# Altium PCB CW308T_STM32F415_CSP.PcbDoc
Units mil, origin at the board's own origin, x right, y up, seen from the top; angles counter-clockwise.
Board outline 2150 x 2585 mil, 2 copper layers (Top Layer, Bottom Layer); 21 components, 30 nets, 176 pads, 85 vias.
Unrouted connection lines stored in the file: 14.
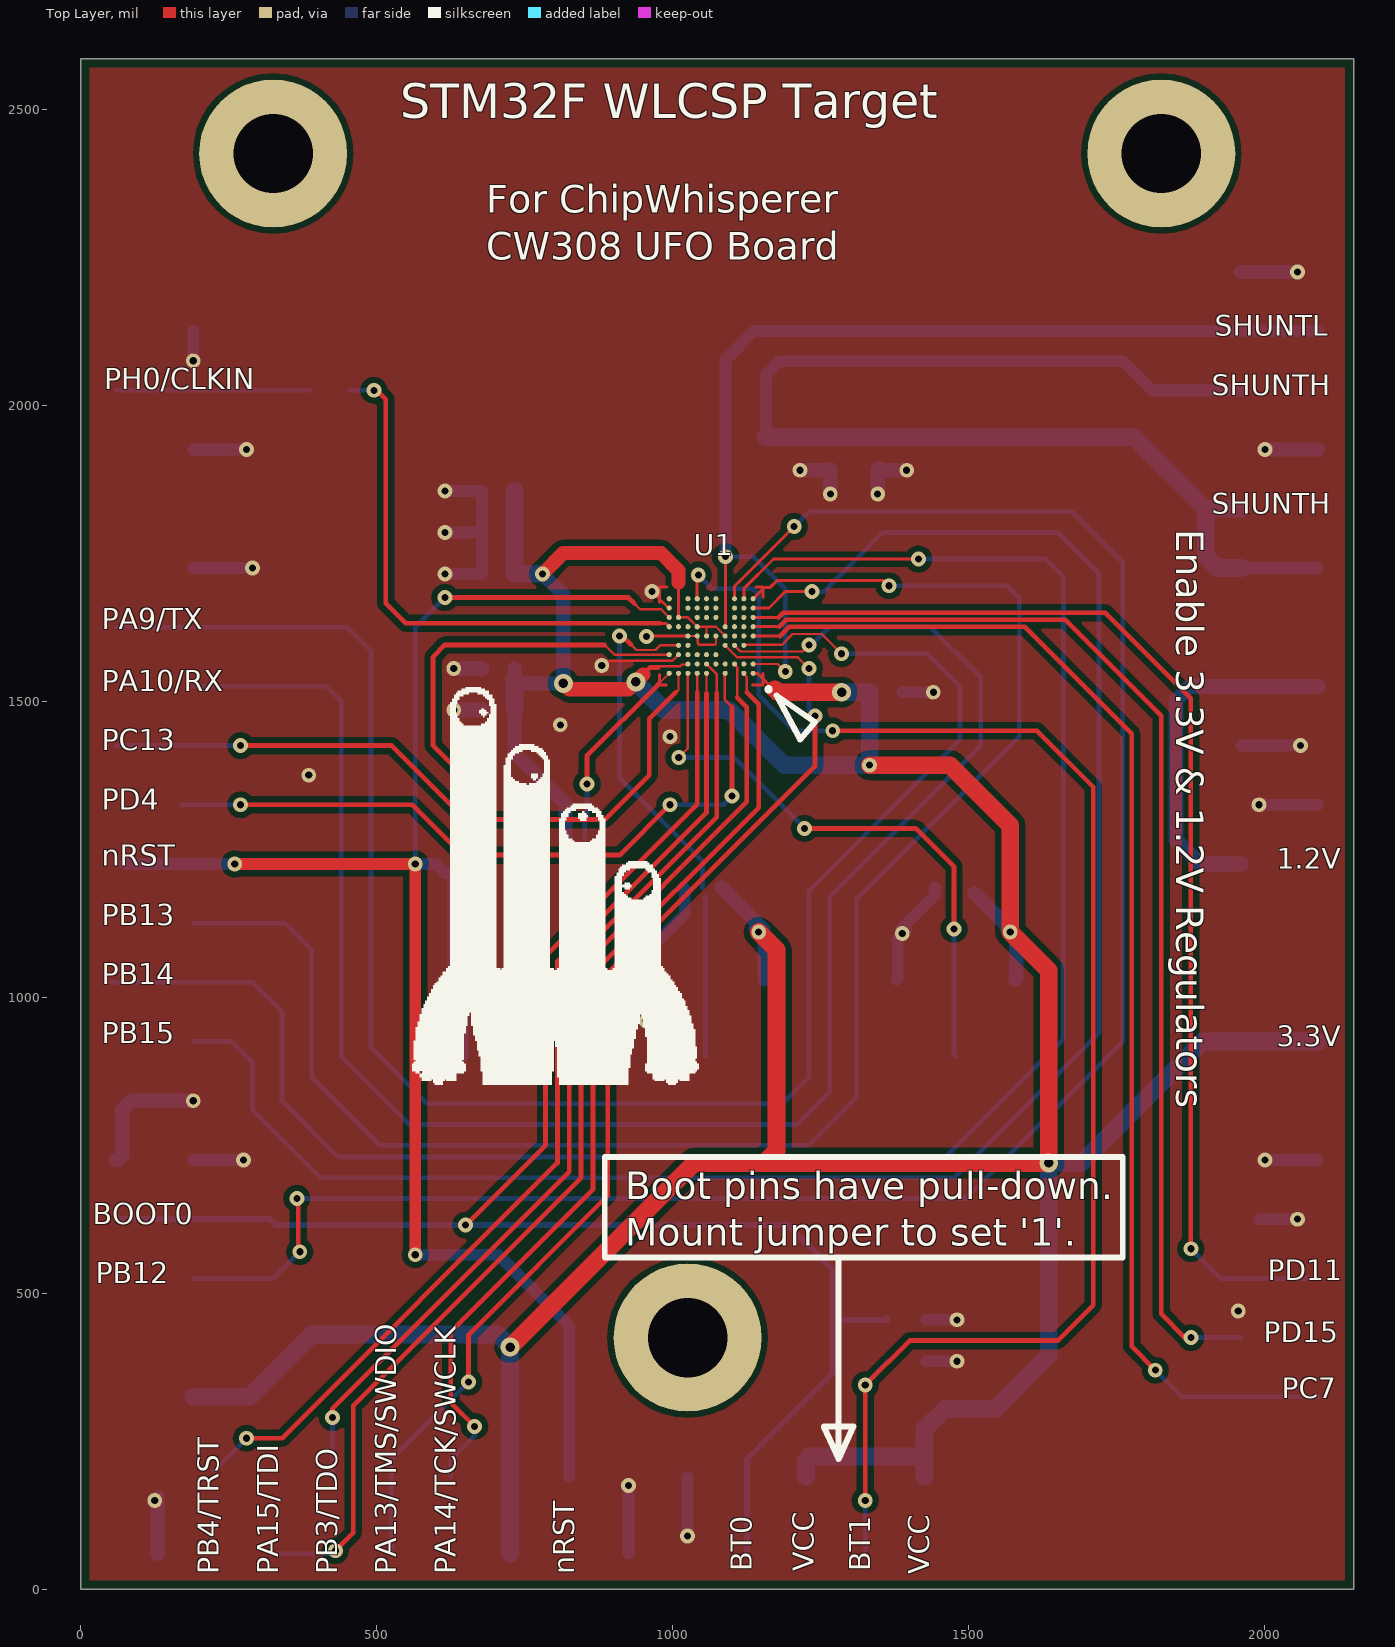
[diagram p0: Top Layer view]
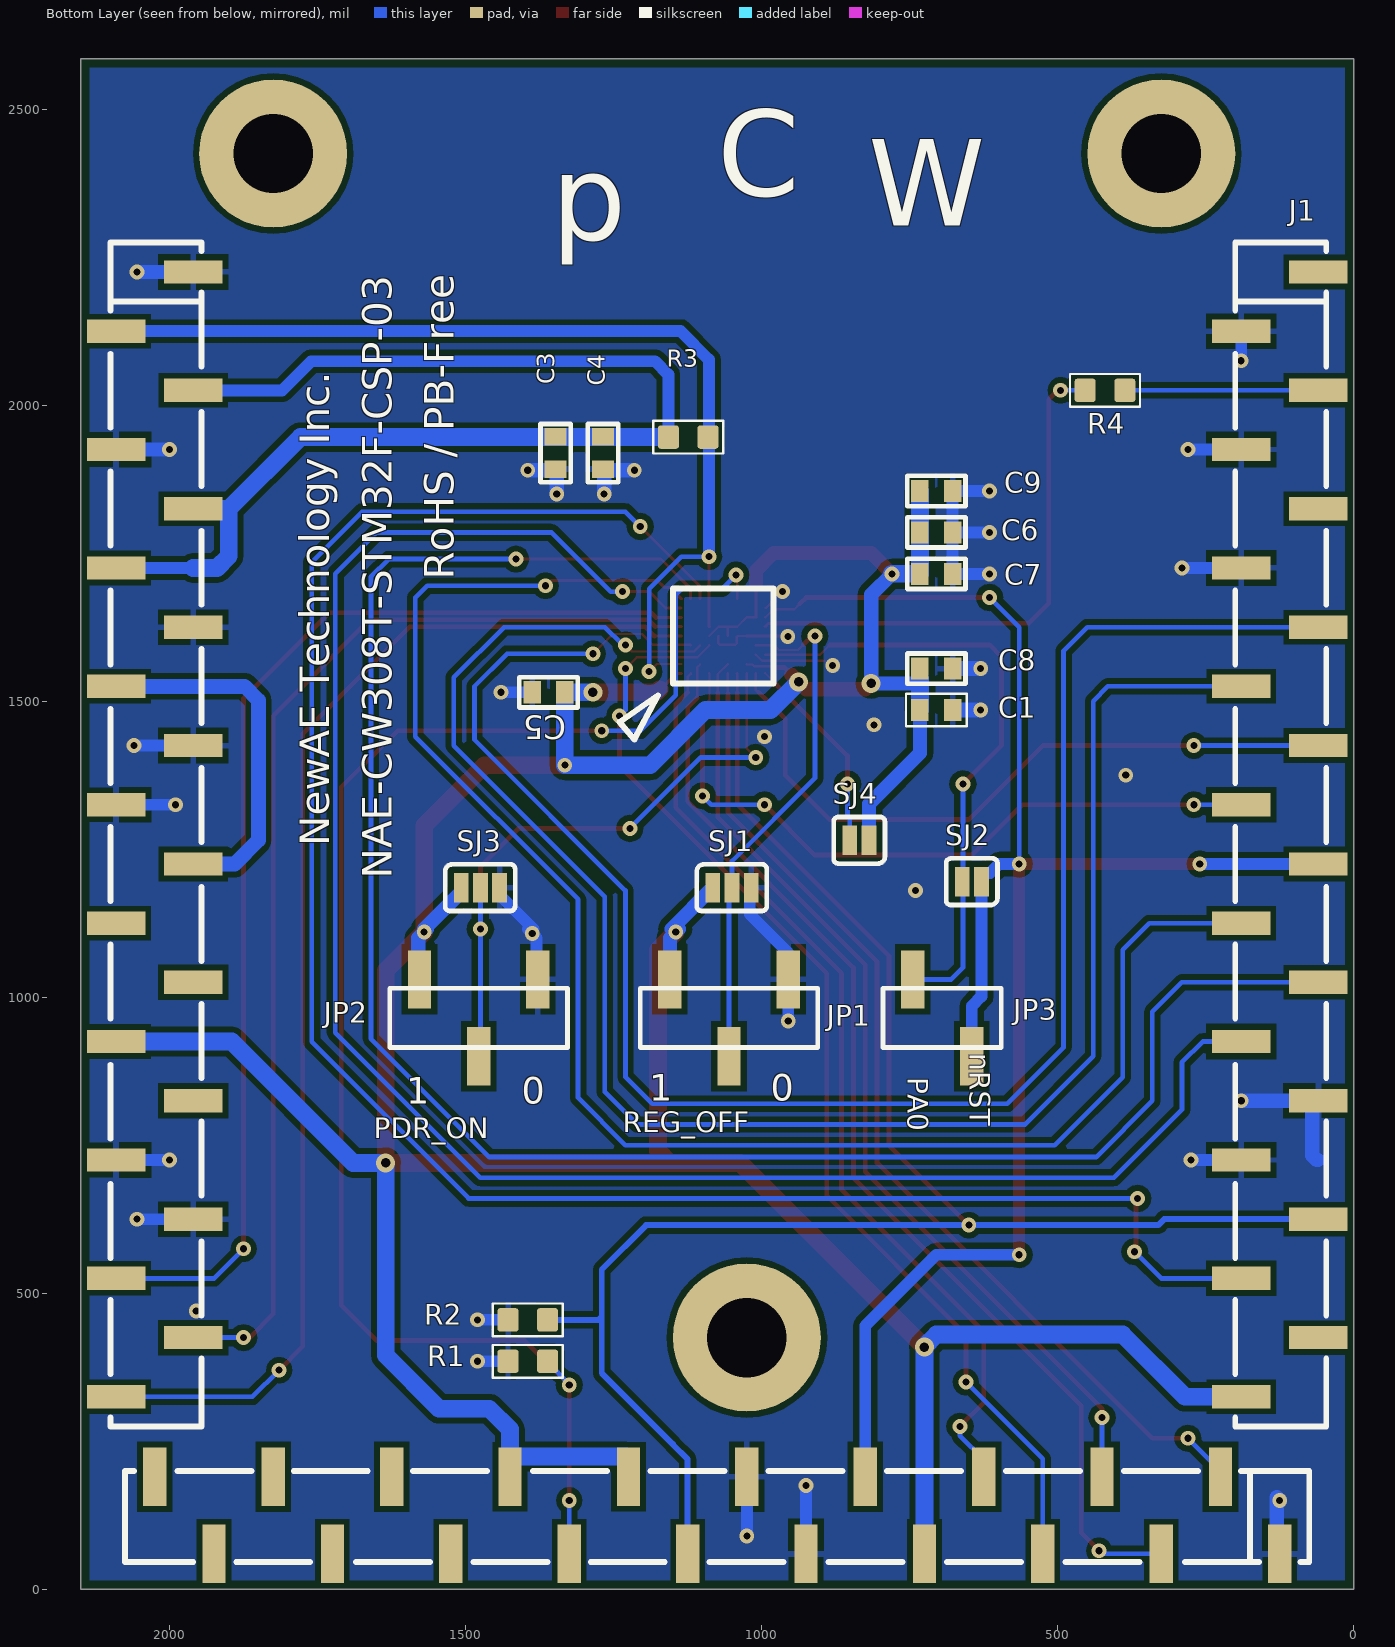
[diagram p1: Bottom Layer view, seen from below]
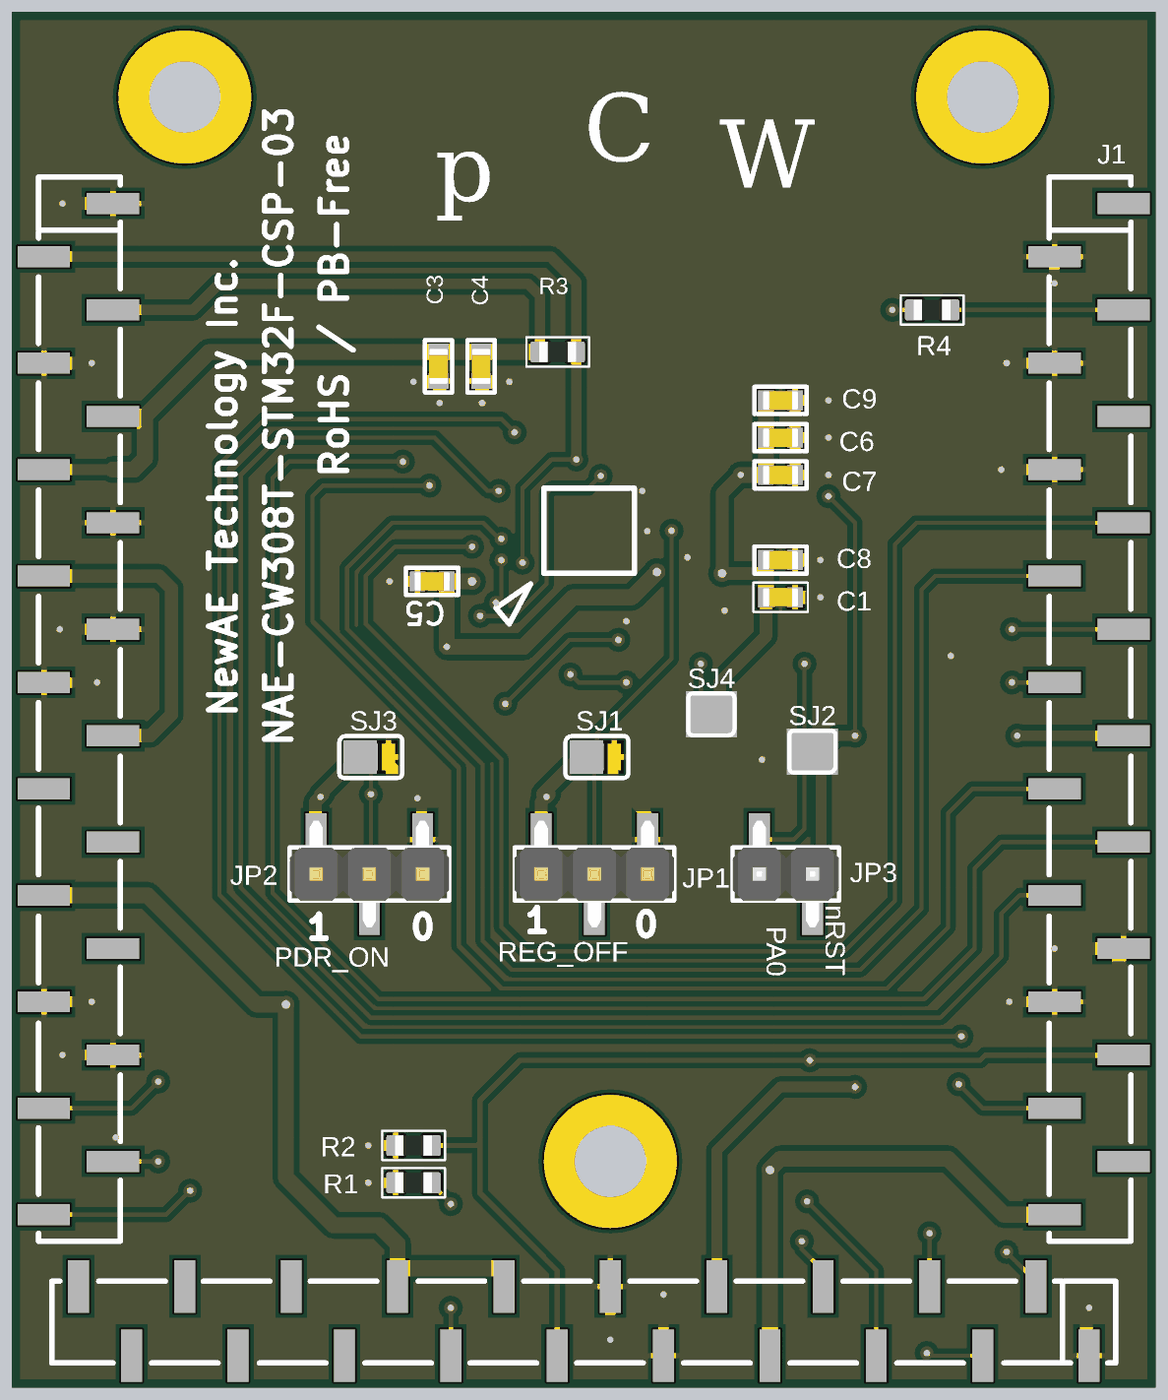
[diagram p2: 3D render of the assembled board from below, using the file's embedded part models]

## Layer stack, top to bottom
Top Solder: solder mask 0.4, Solder Resist, Dk 3.5
Top Layer: signal copper 1.4
Dielectric 1: dielectric 12.6, FR-4, Dk 4.8
Bottom Layer: signal copper 1.4
Bottom Solder: solder mask 0.4, Solder Resist, Dk 3.5

## Board outline
0,0 0,2585 2150,2585 2150,0

## Design rules (kind name [scope] priority, off if disabled: settings)
BoardOutlineClearance [All] p1: gap=15 ignorepadtopadclearanceinfootprint=FALSE except(0: Arc-SplitContinuation Track-SplitContinuation SMDPad-SplitContinuation THPad-SplitContinuation Via-SplitContinuation Fill-SplitContinuation Poly-SplitContinuation Region-SplitContinuation Text-SplitContinuation; 10: SMDPad-OutlineEdge)
Clearance Clearance_1 [InPolygon] p1: gap=10 ignorepadtopadclearanceinfootprint=FALSE
Clearance [All] p2: gap=4 ignorepadtopadclearanceinfootprint=FALSE except(0: Arc-Hole Track-Hole SMDPad-Hole THPad-Hole Via-Hole Fill-Hole Poly-Hole Region-Hole Text-Hole)
HoleSize [All] p1: absolutevalues=TRUE maxlimit=200 minlimit=1 maxpercent=80.000 minpercent=20.000
MinimumSolderMaskSliver [All] p1: minsoldermaskwidth=5
PasteMaskExpansion PasteMaskExpansion_SJ [InComponent('SJ2')] p1: expansion=-200 // Disable SJ shorts
PasteMaskExpansion PasteMaskExpansion_TQFP [InComponent('U1')] p2: expansion=-1.5
PasteMaskExpansion [All] p3: expansion=0
PlaneConnect PlaneConnect_viaDirect [IsVia] p1: planeconnectstyle=Direct reliefexpansion=20 reliefentries=4 reliefconductorwidth=10 reliefairgap=10
PlaneConnect [All] p2: planeconnectstyle=Relief reliefexpansion=20 reliefentries=4 reliefconductorwidth=10 reliefairgap=10
PolygonConnect PolygonConnect_viaDirect [All vs isVia] p1: connectstyle=Direct reliefconductorwidth=10 reliefentries=4 polygonreliefangle="90 Angle" airgapwidth=10
PolygonConnect [All] p2: connectstyle=Relief reliefconductorwidth=10 reliefentries=4 polygonreliefangle="90 Angle" airgapwidth=10
RoutingVias [All] p1: holewidth=12 width=25 viastyle="Through Hole" minholewidth=12 minwidth=25 maxholewidth=28 maxwidth=50
SilkToSilkClearance [All] p1: silktosilkclearance=5
SilkToSolderMaskClearance [IsPad] p1: minsilkscreentomaskgap=5 clearancetoexposedcopper=TRUE
SolderMaskExpansion [All] p1: expansion=4 istentingtop=FALSE
Width [All] p1: maxlimit=100 minlimit=4 preferedwidth=8 toplayer_prefwidth=4 minimp=50.000000 maximp=50.000000 favimp=50.000000
24 further rules are at their usual default settings.

## Components (designator, comment, footprint, x,y, rotation, side; value= is the part's Value field where it differs from the comment)
C1 "100n" CAPC0603_M 705,1485 r180 bottom
C3 "2u2" CAPC0603_M 1348,1919 r270 bottom
C4 "100n" CAPC0603_M 1268,1919 r270 bottom
C5 "100n" CAPC0603_M 1360,1515 r0 bottom
C6 "100n" CAPC0603_M 705,1785 r180 bottom
C7 "100n" CAPC0603_M 705,1715 r180 bottom
C8 "100n" CAPC0603_M 705,1555 r180 bottom
C9 "100n" CAPC0603_M 705,1855 r180 bottom
J1 "CW308_TARGETCON" CW308_SMD_TBOARD_CONN_BOTTOM 125,2225 r0 top locked
JP1 "Straight Header Pins" 1x3_SMD_Straight_pins 1055,965 r90 bottom
JP2 "Straight Header Pins" 1x3_SMD_Straight_pins 1478,965 r90 bottom
JP3 "Header 2" 1x2_SMD_Straight_pins 695,965 r90 bottom
R1 "10k" RESC1608X55N 1395,385 r0 bottom
R2 "10k" RESC1608X55N 1395,455 r0 bottom
R3 "10R" RESC1608X55N 1124,1946 r0 bottom
R4 "RCLOCK" RESC1608X55N 420,2025 r180 bottom value=100R
SJ1 "NC" SJ_3S_NC12 1050,1185 r180 bottom
SJ2 "NC" SJ_2S_NC 645,1195 r0 bottom
SJ3 "NC" SJ_3S_NC12 1475,1185 r180 bottom
SJ4 "NC" SJ_2S_NC 835,1265 r0 bottom
U1 "STM32F415OGY6TR" STM-WLCSP90 1064.8,1609.99 r180 top

## Footprints (in the part's own frame and the unit in brackets; to place one, negate y for a bottom-side part, rotate by r counter-clockwise, add the part's x,y. Pads: shape width x height; smd on the part's side, far side on the other; paste and mask are expansions set on the pad)
1x2_SMD_Straight_pins [mm]
  rect 2.5x1 smd: 1(1.65,1.27) 2(-1.65,-1.27)
  silkscreen extent -1.27,-2.54 1.27,2.54, body extent -2.54,-2.54 2.54,2.54, height 9.9
1x3_SMD_Straight_pins [mm]
  rect 2.5x1 smd: 1(1.65,2.54) 2(-1.65,0) 3(1.65,-2.54)
  silkscreen extent -1.27,-3.81 1.27,3.81, body extent -2.54,-3.81 2.54,3.81, height 9.9
CAPC0603_M [mm]
  rect 0.75x0.95 smd: 1(-0.7,0) 2(0.7,0)
  silkscreen extent -1.3,-0.7 1.3,0.7, body extent -0.85,-0.45 0.85,0.45, height 0.9
CW308_SMD_TBOARD_CONN_BOTTOM [mm]
  rect 2.5x1 smd far side: A1(-1.65,0) A2(1.65,-2.54) A3(-1.65,-5.08) A4(1.65,-7.62) A5(-1.65,-10.16) A6(1.65,-12.7) A7(-1.65,-15.24) A8(1.65,-17.78) A9(-1.65,-20.32) A10(1.65,-22.86) A11(-1.65,-25.4) A12(1.65,-27.94) A13(-1.65,-30.48) A14(1.65,-33.02) A15(-1.65,-35.56) A16(1.65,-38.1) A17(-1.65,-40.64) A18(1.65,-43.18) A19(-1.65,-45.72) A20(1.65,-48.26) C1(46.61,0) C2(49.91,-2.54) C3(46.61,-5.08) C4(49.91,-7.62) C5(46.61,-10.16) C6(49.91,-12.7) C7(46.61,-15.24) C8(49.91,-17.78) C9(46.61,-20.32) C10(49.91,-22.86) C11(46.61,-25.4) C12(49.91,-27.94) C13(46.61,-30.48) C14(49.91,-33.02) C15(46.61,-35.56) C16(49.91,-38.1) C17(46.61,-40.64) C18(49.91,-43.18) C19(46.61,-45.72) C20(49.91,-48.26)
  rect 1x2.5 smd far side: B1(0,-54.99) B2(2.54,-51.69) B3(5.08,-54.99) B4(7.62,-51.69) B5(10.16,-54.99) B6(12.7,-51.69) B7(15.24,-54.99) B8(17.78,-51.69) B9(20.32,-54.99) B10(22.86,-51.69) B11(25.4,-54.99) B12(27.94,-51.69) B13(30.48,-54.99) B14(33.02,-51.69) B15(35.56,-54.99) B16(38.1,-51.69) B17(40.64,-54.99) B18(43.18,-51.69) B19(45.72,-54.99) B20(48.26,-51.69)
  round 6.35 hole 3.404: MH1(5.08,5.08) MH2(22.86,-45.72) MH2(43.18,5.08)
RESC1608X55N [mm] "Chip Resistor, Body 1.6x0.8mm, EIA 0603, IPC Medium Density"
  round 0.254 on Mech15: 0(0,0)
  rrect25% 0.9x1 smd: 1(-0.85,0) 2(0.85,0)
  Top Layer pour cut-out: -0.6,0.5 -0.4,0.7 0.4,0.7 0.6,0.5 0.6,-0.5 0.4,-0.7 -0.4,-0.7 -0.6,-0.5
  silkscreen extent -1.5,-0.7 1.5,0.7, body extent -0.87,-0.47 0.88,0.48, height 0.54
SJ_2S_NC [mil] "Solder Jumper, closed with solder paste"
  rect 25x50 smd: 1(-16.22,0) 2(16.22,0)
  silkscreen extent -43,-39 43,39
SJ_3S_NC12 [mil] "3-Way Solder Jumper, pads 1-2 closed"
  rect 25x50 smd: 1(-32.43,0) 2(0,0)
  rect 25x50 smd paste-393.7: 3(32.44,0)
  silkscreen extent -60,-39 59,39
STM-WLCSP90 [mm] "BGA, 90-Leads, Body 3.97x4.22mm, Pitch 0.4mm"
  round 0.22 smd: A1(-1.8,1.6) A2(-1.4,1.6) A4(-0.6,1.6) A6(0.2,1.6) A7(0.6,1.6) A8(1,1.6) A9(1.4,1.6) A10(1.8,1.6) B1(-1.8,1.2) B2(-1.4,1.2) B3(-1,1.2) B4(-0.6,1.2) B5(-0.2,1.2) B6(0.2,1.2) B7(0.6,1.2) B8(1,1.2) C5(-0.2,0.8) C6(0.2,0.8) C7(0.6,0.8) C8(1,0.8) C9(1.4,0.8) C10(1.8,0.8) D2(-1.4,0.4) D3(-1,0.4) D4(-0.6,0.4) D8(1,0.4) D9(1.4,0.4) E1(-1.8,0) E2(-1.4,0) E3(-1,0) E4(-0.6,0) E5(-0.2,0) E6(0.2,0) E7(0.6,0) E8(1,0) F1(-1.8,-0.4) F2(-1.4,-0.4) F3(-1,-0.4) F4(-0.6,-0.4) F7(0.6,-0.4) F8(1,-0.4) F9(1.4,-0.4) F10(1.8,-0.4) G1(-1.8,-0.8) G2(-1.4,-0.8) G3(-1,-0.8) G5(-0.2,-0.8) G6(0.2,-0.8) G7(0.6,-0.8) G9(1.4,-0.8) G10(1.8,-0.8) H1(-1.8,-1.2) H2(-1.4,-1.2) H3(-1,-1.2) H5(-0.2,-1.2) H6(0.2,-1.2) H7(0.6,-1.2) H8(1,-1.2) H10(1.8,-1.2) J1(-1.8,-1.6) J2(-1.4,-1.6) J3(-1,-1.6) J5(-0.2,-1.6) J6(0.2,-1.6) J7(0.6,-1.6) J8(1,-1.6) J10(1.8,-1.6)
  silkscreen extent -2.54,2.2 -2.38,2.36, body extent -2.11,-1.98 2.11,1.98, height 0.62

## Part data
C1 C4 C5 C6 C7 C8 C9: library part CCHIP-100n-0603, "100n, 0603", Case-EIA=0603, Case-Metric=1608, Component Group=Capacitor, Component Type=Standard, Mounting Technology=SMT, Part Number=CCHIP-100n-0603, Pin Count=2
C3: library part CCHIP-2u2-0603, "2u2, 0603", Case-EIA=0603, Case-Metric=1608, Component Group=Capacitor, Component Type=Standard, Mounting Technology=SMT, Part Number=CCHIP-2u2-0603, Pin Count=2
J1: library part CW308_TBOARD, "CW308 \"Standard\" Target Board Connector", Component Group=Mechanical, Component Type=Standard, Mounting Technology=Through-hole, Part Number=CW308_TBOARD, Pin Count=60, Pitch=2.54mm
JP1 JP2: library part HDR_3PIN, "1x3 Straight pin header", Manufacture 1="Wurth Electronics Inc.", Manufacture Part Number 1=61300311121, Supplier Part Number 1=732-5316-ND, Component Group=Connector, Component Type=Standard, Mounting Technology=Through-hole, Part Number=HDR_3PIN, Pin Count=3, PP Material Stack=0, PP Rotation=0, RoHS=Yes, Supplier 1=Digi-Key
JP3: "Header, 2-Pin", LatestRevisionDate=17-Jul-2002, LatestRevisionNote="Re-released for DXP Platform.", Publisher="Altium Limited"
R1 R2: library part RCHIP-10K-0603, "10k res, 0603, 1%, 1/10W", Case-EIA=0603, Case-Metric=1608, Manufacture 1=Yageo, Manufacture Part Number 1=RC0603FR-0710KL, Rated Power=0.1W, Rated Voltage=75VDC, Supplier Part Number 1=311-10.0KHRCT-ND, Temperature Range="-55C to 155C", TOLERANCE=1%, Component Group=Resistor, Component Type=Standard, Mounting Technology=SMT, Part Number=RCHIP-10K-0603, Pin Count=2, Supplier 1=Digi-Key
R3: library part RCHIP-10R-0603, "10R res, 0603, 1%, 1/10W", Case-EIA=0603, Case-Metric=1608, Manufacture 1=Yageo, Manufacture Part Number 1=RC0603FR-0710RL, Rated Power=0.1W, Rated Voltage=75VDC, Supplier Part Number 1=311-10.0HRCT-ND, Temperature Range="-55C to 155C", TOLERANCE=1%, Component Group=Resistor, Component Type=Standard, Mounting Technology=SMT, Part Number=RCHIP-10R-0603, Pin Count=2, Supplier 1=Digi-Key
R4: library part RCHIP-100R-0603, "100R res, 0603, 1%, 1/10W", Case-EIA=0603, Case-Metric=1608, Manufacture 1=Yageo, Manufacture Part Number 1=RC0603FR-07100RL, Rated Power=0.1W, Rated Voltage=75VDC, Supplier Part Number 1=311-100HRCT-ND, Temperature Range="-55C to 155C", TOLERANCE=1%, Component Group=Resistor, Component Type=Standard, Mounting Technology=SMT, Part Number=RCHIP-100R-0603, Pin Count=2, Supplier 1=Digi-Key
SJ1 SJ3: library part SJ_3S_12JMP, "Solder Jumper, NC", Component Group="PCB Feature", Component Type="Standard (No BOM)", Mounting Technology=COPPER, Part Number=SJ_3S_12JMP, Pin Count=3
SJ2 SJ4: library part SJ_2S, "Solder Jumper, NC", Component Group="PCB Feature", Component Type="Standard (No BOM)", Mounting Technology=COPPER, Part Number=SJ_2S, Pin Count=2
U1: library part CMP-0243-00132-2, "ARM Cortex-M4 32-bit MCU+FPU, 210 DMIPS, 1024 kB Flash, 192 kB Internal RAM, 72 I/Os, 90-pin WLCSP, -40 to 85 degC, Tape and Reel", I/Os (High Current)=72, Manufacturer=STMicroelectronics, Operating Frequency(F) (Processor speed) (MHz)=168, Supply Voltage(Vcc) max (V)=3.6, Supply Voltage(Vcc) min (V)=1.8, ComponentLink1Description="Manufacturer URL", ComponentLink1URL=http://www.st.com/web/en/home.html, ComponentLink2Description=Datasheet, ComponentLink2URL=http://www.st.com/st-web-ui/static/active/en/resource/technical/document/datasheet/DM00035129.pdf, ComponentLink3Description="Package Specification", ComponentLink3URL=http://www.st.com/st-web-ui/static/active/en/resource/technical/document/datasheet/DM00035129.pdf, Core="ARM Cortex-M4", D/A Converter=2x12-bit, DatasheetVersion="Rev. 4", FLASH Size (Prog) (kB)=1024, Internal RAM Size (kB)=192, Mounting Technology="Surface Mount", PackageDescription="90-Ball Wafer Level Chip Size Package, 0.4 mm Pitch", PackageReference=WLCSP90, PackageVersion="Rev. 4, 06/2013", Packing="Tape and Reel", PartNumber=STM32F415OGY6TR

## Via types
v1: diameter 25, hole 12, Top Layer to Bottom Layer, tented both sides, 80 vias
v2: diameter 32, hole 16, Top Layer to Bottom Layer, tented both sides, 5 vias

## Nets (pads, with @x,y where several pads share a name; then routed paths per layer and width w, separated by ;. In a path a pad name is that pad's centre, name@x,y a point inside that pad or via, vN(x,y) a via of type N, cw(c..) or ccw(c..) an arc to the next point about the centre after c; other vN are vias at no path point)
BOOT0: J1.A17 J1.B11 R2.1 U1.A7 | length 2976
  Top Layer w4: 1041.18,1515 U1.A7 U1.A7@1042,1546.18
  Top Layer w8: v1(650,615) 785,750 785,1070 1041.18,1326.18 1041.18,1515
  Bottom Layer w10: J1.A17 320,625 330,615 v1(650,615) 1195,615 1270,540 1270,460 ; J1.B11 1125,219.49 1150,244.49 1150,245 1270,365 1270,460 ; R2.1@1361.54,456.97 R2.1 1275,455 1270,460
BOOT1: J1.B13 R1.1 U1.J7 | length 2611.7
  Top Layer w5: U1.J7 1041.18,1711.18 v1(1043.09,1713.09)
  Top Layer w8: v1(1270,1450) 1615,1450 1710,1355 1710,480 1650,420 1400,420 v1(1325,345) v1(1325,150)
  Bottom Layer w8: v1(1043.09,1713.09) 1066.18,1690 1135,1690 1145,1680 1145,1510 1205,1450 v1(1270,1450) ; J1.B13 v1(1325,150) ; v1(1325,345) 1325,346.5 1361.54,383.03 R1.1
CLKI: R4.1 U1.F10 | length 907.9
  Top Layer w5: 978.51,1631.49 988.19,1631.49 U1.F10
  Top Layer w8: v1(495,2025) 500,2025 515,2010 515,1665 548.51,1631.49 978.51,1631.49
  Bottom Layer w8: R4.1 v1(495,2025)
CS: J1.A18 U1.J3 | length 3369.9
  Top Layer w5: U1.J3 1104.17,1694.17 v1(1205,1795)
  Top Layer w8: v1(365,660) 367.5,657.5 367.5,572.5 v1(370,570)
  Bottom Layer w8: J1.A18 325,525 v1(370,570) ; v1(365,660) 1495,660 1760,925 1760,1735 1675,1820 1230,1820 v1(1205,1795)
GND: C1.2 C3.2 C4.2 C5.2 C6.2 C7.2 C8.2 C9.2 J1.A2 J1.A4 J1.A6 J1.A15 J1.A16 J1.B1 J1.B9 J1.B10 J1.C1 J1.C4 J1.C7 J1.C9 J1.C10 J1.C16 J1.C17 JP1.3 JP2.3 R1.2 R2.2 SJ1.3 SJ3.3 U1.C9 U1.E5 U1.E7 U1.E8 U1.H10 | length 2970.8
  Top Layer w4: v1(880,1560) 885.68,1560 893.85,1568.17 999.35,1568.17 U1.C9 ; v1(965,1685) 992.76,1657.24 U1.H10 ; U1.E8 U1.E7 1042.07,1609.1 1042.07,1597.34 1044.42,1595 1070.66,1595 1073,1597.34 1073,1609.67 U1.E5
  Top Layer w5: v1(955.74,1609.37) 956.37,1610 U1.E8 ; 977.13,1666.29 977.13,1692.1 ; 977.53,1692.7 990,1692.7
  Bottom Layer w20: J1.A16 v1(275,725) ; J1.A6 v1(290,1725) ; J1.A4 v1(280,1925) ; J1.A2 J1.A2 v1(190,2075) ; v1(615,1715) C7.2 C6.2 ; v1(615,1785) C6.2 ; v1(615,1855) C9.2 C6.2 ; J1.B9 v1(925,175) ; v1(955,960) JP1.3 955,1075 1020,1140 1020,1182.56 SJ1.3 ; v1(1025,90) J1.B10 ; JP2.3 1380,1031.96 1380,1100 v1(1387.5,1107.5) 1395,1115 1385.06,1115 1442.56,1172.5 SJ3.3 ; C5.2 v1(1440,1515) ; R1.2 v1(1480,385) ; R2.2 v1(1480,455) ; J1.C9 v1(2060,1425) ; v1(1990,1325) J1.C10 ; J1.C17@1990.08,625 v1(2055,625) ; v1(2000,725) J1.C16
  Bottom Layer w24: 60.04,725 62.31,725 70,732.69 70,810 85,825 v1(189.96,825) ; v1(125,150) 125,150.27 130,155.27 J1.B1@130,60.04 ; J1.C1 v1(2055,2225) ; v1(2000,1925) J1.C4
  Bottom Layer w25: v1(630,1485) C1.2 ; v1(630,1555) C8.2 ; v1(1215,1890) 1264.56,1890 1266,1891.44 v1(1266,1850) ; v1(1346,1850) 1346,1891.44 C3.2@1348,1893.44 ; C3.2 1349.44,1890 v1(1395,1890)
  other v1: 1955,470 740,1180 385,1375 995,1440 810,1460
GPIO3: J1.A9 U1.A9 | length 1176
  Top Layer w4: 1005,1515 1006,1515 1009.68,1518.68 U1.A9
  Top Layer w8: v1(270,1425) 525,1425 650,1300 885,1300 960,1375 960,1470 1005,1515
  Bottom Layer w8: J1.A9 v1(270,1425)
GPIO4: J1.A10 U1.A4 | length 1218.8
  Top Layer w4: U1.A4 1088,1546.57 1088,1502 1100,1490
  Top Layer w8: v1(270,1325) 560,1325 645,1240 910,1240 v1(995,1325) ; v1(1100,1340) 1100,1490
  Bottom Layer w8: J1.A10@170,1325 J1.A10 v1(270,1325) ; v1(995,1325) 1085,1325 v1(1100,1340)
INTERNAL_NRST: JP3.1 SJ2.2 U1.C10 | length 1059.3
  Top Layer w4: 885,1595 901.5,1578.5 U1.C10
  Top Layer w8: v1(660,1360) 595,1425 595,1575 615,1595 885,1595
  Bottom Layer w8: v1(660,1360) 660,1050 680.04,1029.96 JP3.1
LED1: J1.C18 U1.G1 | length 1968.2
  Top Layer w5: U1.G1 1178.56,1641.49
  Top Layer w8: 1178.56,1641.49 1186.57,1649.5 1730.5,1649.5 1875,1505 v1(1875,575)
  Bottom Layer w8: v1(1875,575) 1925,525 J1.C18
LED2: J1.C19 U1.F1 | length 1923.1
  Top Layer w5: U1.F1 1179.78,1625.74
  Top Layer w8: 1179.78,1625.74 1191.54,1637.5 1662.5,1637.5 1825,1475 1825,465 1865,425 v1(1875,425)
  Bottom Layer w8: v1(1875,425) J1.C19
LED3: J1.C20 U1.E1 | length 2105.7
  Top Layer w5: U1.E1 1181,1609.99
  Top Layer w8: 1181,1609.99 1196.51,1625.5 1594.5,1625.5 1775,1445 1775,410 v1(1815,370)
  Bottom Layer w8: v1(1815,370) 1860,325 J1.C20
MISO: J1.A13 U1.J2 | length 3273.1
  Top Layer w5: U1.J2 1119.92,1689.92 1170,1740 v1(1415,1740)
  Bottom Layer w8: J1.A13@50,1025 J1.A13 290,1025 340,975 340,825 435,730 1460,730 1660,930 1660,1710 1630,1740 v1(1415,1740)
MOSI: J1.A14 U1.H1 | length 3214.7
  Top Layer w5: U1.H1@1135.87,1657.24 1162.24,1657.24 1190,1685 v1(1235,1685)
  Bottom Layer w8: J1.A14 255,925 290,890 290,810 405,695 1475,695 1720,940 1720,1715 1650,1785 1355,1785 1255,1685 v1(1235,1685)
NetC3_1: C3.1 C4.1 J1.C3 J1.C5 J1.C6 R3.2 | length 2068.6
  Bottom Layer w20: R3.2 1157.46,2051.46 1180,2074 1761,2074 1810,2025 J1.C3 ; 1960.04,1725 J1.C6
  Bottom Layer w30: R3.2 1779,1946 1900,1825 ; 1960.04,1725 1920,1725 1900,1745 1900,1825 ; J1.C5 1900,1825
NetJ1_A3: J1.A3 R4.2 | length 326.5
  Bottom Layer w8: J1.A3 R4.2
NetJ1_C2: J1.C2 R3.1 U1.B1 U1.F4 | length 1796.4
  Top Layer w4: U1.B1 1177.25,1562.75 v1(1190,1550)
  Top Layer w5: U1.F4@1088,1626.37 1088.62,1625.75 1089,1626.13 1088.62,1626.5 1089,1626.88 v1(1089,1744)
  Bottom Layer w8: v1(1089,1744) 1136,1744 1190,1690 v1(1190,1550)
  Bottom Layer w20: v1(1089,1744) 1089,2077 1137,2125 J1.C2
NetJ1_C8: J1.C8 J1.C11 | length 612.9
  Bottom Layer w25: J1.C11 1890,1225 1850,1265 1850,1501.67 1873.33,1525 J1.C8
NetJP1_2: JP1.2 SJ1.2 U1.D9 | length 865.6
  Top Layer w4: 929.25,1595.75 938.5,1586.5 970.5,1586.5 978.24,1594.24 U1.D9
  Top Layer w8: v1(910,1610) 914.6,1610 928.85,1595.75 929.25,1595.75
  Bottom Layer w8: v1(910,1610) 910,1370 1050,1230 SJ1.2 ; JP1.2 1055,1115 SJ1.2@1055,1170
NetJP2_2: JP2.2 SJ3.2 U1.A8 | length 1081.2
  Top Layer w4: v1(1010,1405) 1025.43,1420.43 U1.A8
  Top Layer w8: v1(1222.5,1285) 1410,1285 1475,1220 v1(1475,1115)
  Bottom Layer w8: v1(1010,1405) 1102.5,1405 v1(1222.5,1285) ; SJ3.2 v1(1475,1115) 1475,903.04 JP2.2
NetSJ4_2: SJ4.2 U1.A10 | length 369.7
  Top Layer w4: 975,1528.06 977.18,1530.24 U1.A10
  Top Layer w5: 977.18,1527.64 977.18,1530.24 977.18,1545.19 ; 977.78,1527.24 988.86,1527.24
  Top Layer w8: v1(855,1360) 855,1408.06 975,1528.06
  Bottom Layer w8: SJ4.2 851.22,1302 855,1305.78 v1(855,1360)
nRST: J1.A11 J1.B8 JP3.2 SJ2.1 U1.G10 | length 2963.5
  Top Layer w4: 935,1665 945,1655 980.43,1655 U1.G10
  Top Layer w8: v1(615,1675) 925,1675 935,1665
  Top Layer w20: v1(260,1225) v1(565,1225) v1(565,565)
  Bottom Layer w8: v1(565,1225) 565,1625 v1(615,1675)
  Bottom Layer w20: J1.A11@75,1225 v1(260,1225) ; v1(565,565) 705,565 825,445 J1.B8 ; v1(565,1225) 598.78,1225 613.78,1210 626.28,1210 628.78,1207.5 SJ2.1 628.78,1001.22 645,985 JP3.2
RX: J1.A8 U1.D3 | length 3033.8
  Top Layer w4: U1.D3 1114.5,1583.91 1218.91,1583.91 v1(1230,1595)
  Bottom Layer w8: J1.A8 415,1525 440,1500 440,900 555,785 1210,785 1265,840 1265,1170 1520,1425 1520,1540 1435,1625 1264.6,1625 1234.6,1595 v1(1230,1595)
SCK: J1.A12 U1.J1 | length 2891.6
  Top Layer w5: U1.J1 1149.98,1687.3 ; 1140.75,1692.74 1151.83,1692.74 ; 1152.43,1674.79 1152.43,1692.34 1164.6,1692.34 1176.26,1704 1356,1704 v1(1365,1695)
  Bottom Layer w8: J1.A12 345,1125 390,1080 390,865 505,750 1230,750 1310,830 1310,1165 1585,1440 1585,1675 1565,1695 v1(1365,1695)
TCK: J1.B6 U1.A2 | length 1616
  Top Layer w4: U1.A2 1119.92,1545.74 1125,1540.66 1125,1515
  Top Layer w8: v1(665,275) 625,315 625,435 865,675 865,1040 1145,1320 1145,1495 1125,1515
  Bottom Layer w8: J1.B6 625,219.49 665,259.49 v1(665,275)
TDI: J1.B3 U1.B3 | length 1901.3
  Top Layer w4: U1.B3 1104.17,1561.49 1109,1556.66 1109,1506
  Top Layer w8: v1(430,65) 460,95 460,310 845,695 845,1050 1125,1330 1125,1490 1109,1506
  Bottom Layer w8: J1.B3 425.04,60.04 v1(430,65)
TDO: J1.B4 U1.B6 | length 1648.7
  Top Layer w4: U1.B6 1074,1545.68 1074,1514
  Top Layer w8: v1(425,290) 425,305 825,705 825,1055 1074,1304 1074,1514
  Bottom Layer w8: J1.B4 v1(425,290)
TMS: J1.B5 U1.D4 | length 1953.1
  Top Layer w4: U1.D4 1108.67,1574 1211,1574 v1(1230,1555)
  Top Layer w8: v1(655,350) 655,430 890,665 890,1040 1240,1390 v1(1240,1475)
  Bottom Layer w8: J1.B5 525,220 v1(655,350) ; v1(1230,1555) 1230,1485 v1(1240,1475)
TRST: J1.B2 U1.A6 | length 1726.7
  Top Layer w4: 1056.93,1513.07 U1.A6
  Top Layer w8: v1(280,255) 340,255 805,720 805,1060 1056.93,1311.93 1056.93,1513.07
  Bottom Layer w8: J1.B2@225,200 v1(280,255)
TX: J1.A7 U1.D2 | length 3089.7
  Top Layer w4: U1.D2 1120.68,1595 1183.84,1595 1202.34,1613.5 1251.5,1613.5 v1(1285,1580)
  Bottom Layer w8: J1.A7 450,1625 490,1585 490,915 585,820 1184.81,820 1230,865.19 1230,1180 1485,1435 1485,1525 1430,1580 v1(1285,1580)
VCC: C1.1 C5.1 C6.1 C7.1 C8.1 C9.1 J1.A20 J1.B7 J1.B12 J1.B14 J1.C14 JP1.1 JP2.1 SJ1.1 SJ3.1 SJ4.1 U1.A1 U1.B8 U1.E4 U1.E6 U1.F7 U1.G9 | length 7384.6
  Top Layer w4: 975,1557 977,1559 1012.42,1559 1015.28,1561.86 1024.54,1561.86 U1.B8 ; U1.G9 1025.43,1641.49 U1.F7 1056.93,1625.74 ; U1.E6 1056.93,1625.74 ; U1.E4 1072.68,1625.74 1056.93,1625.74
  Top Layer w5: U1.G9 1009.68,1700.32 ; 1134.53,1527.29 1152.07,1527.29 ; U1.A1 1143.15,1547 1152.47,1537.68 ; 1152.47,1527.89 1152.47,1537.68 ; 1152.47,1547 1152.47,1537.68 ; 1170.15,1520 1152.47,1537.68
  Top Layer w8: 950,1545 962,1557 975,1557 ; 1170.15,1520 1172.48,1520
  Top Layer w24: v1(780,1715) 815,1750 980,1750 1009.68,1720.32 1009.68,1700.32 ; v2(815,1530) 825,1520 925,1520 v2(937.5,1532.5) 950,1545
  Top Layer w30: v2(725,408.75) 1036.25,720 1155,720 ; v1(1145,1110) 1175,1080 1175,740 1155,720 ; 1172.48,1520 1177.48,1515 v2(1285,1515) ; v1(1332.44,1391.89) 1468.11,1391.89 1570,1290 v1(1570,1110) 1635,1045 v2(1635,720) 1155,720
  Bottom Layer w24: C1.1 732.56,1412.44 818.78,1326.22 SJ4.1 ; C8.1 732.56,1537.44 740,1530 v2(815,1530) 815,1680 v1(780,1715) ; SJ1.1 1152.43,1115 1139.73,1115 1144.73,1110 v1(1145,1110) 1155,1100 JP1.1 ; SJ3.1@1510,1175 1570,1115 1565,1115 v1(1570,1110) 1580,1100 1580,1031.96 JP2.1
  Bottom Layer w30: J1.A20 285,325 390,430 705,430 725,410 v2(725,408.75) J1.B7 ; C1.1 C8.1@732.56,1537.44 ; C9.1 C6.1 C7.1 v1(780,1715) ; v2(937.5,1532.5) 985,1485 1095,1485 1188.11,1391.89 v1(1332.44,1391.89) C5.1 v2(1285,1515) ; J1.B12 1225,215.31 1229.69,220 1229.69,224.17 1420.31,224.17 J1.B14@1425,219.49 ; J1.B14 J1.B14@1425,219.49 ; J1.C14 1895,925 1690,720 v2(1635,720) 1635,395 1545,305 1460,305 1425,270 J1.B14@1425,219.49
pads on no net: J1.A1 J1.A5 J1.A19 J1.B15 J1.B16 J1.B17 J1.B18 J1.B19 J1.B20 J1.C12 J1.C13 J1.C15 J1.MH1 J1.MH2 R1.0 R2.0 R3.0 R4.0 U1.B2 U1.B4 U1.B5 U1.B7 U1.C5 U1.C6 U1.C7 U1.C8 U1.D8 U1.E2 U1.E3 U1.F2 U1.F3 U1.F8 U1.F9 U1.G2 U1.G3 U1.G5 U1.G6 U1.G7 U1.H2 U1.H3 U1.H5 U1.H6 U1.H7 U1.H8 U1.J5 U1.J6 U1.J8 U1.J10

## Polygon pours and split planes (outlines as drawn)
GND on Bottom Layer "GND_L02_P000" (solid, remove dead copper, pour order 0): 0,0 2150,0 2150,2585 0,2585
GND on Top Layer "GND_L01_P002" (solid, remove dead copper, pour order 2): 0,0 2150,0 2150,2585 0,2585

## Other copper
Top Layer:
  pour cut-out: 982.22,1665.37 965.79,1665.37 965.79,1676.45 985.73,1676.45
  pour cut-out: 977.04,1692.14 977.04,1669.9 993.78,1669.9 993.78,1699.71 987.13,1699.71 987.13,1693.86

## Silkscreen, mask and mechanical layers (free items; w line width, h text height)
Top Overlay:
  drawing of 13 lines, arcs and shapes, not listed
  text "STM32F WLCSP Target" at 540,2465 h100
  text "For ChipWhisperer / CW308 UFO Board" at 685,2230 h80
  text "SHUNTL" at 1915,2105 h59.06
  text "PH0/CLKIN" at 40,2015 h60
  text "SHUNTH" at 1910,2005 h59.06
  text "SHUNTH" at 1910,1805 h59.06
  text "Enable 3.3V & 1.2V Regulators" at 1835,1790 h78.74 r270
  text "PA9/TX" at 35,1610 h60
  text "PA10/RX" at 35,1505 h60
  text "PC13" at 35,1405 h60
  text "PD4" at 35,1305 h60
  text "nRST" at 35,1210 h60
  text "1.2V" at 2020,1205 h59.06
  text "PB13" at 35,1110 h60
  text "PB14" at 35,1010 h60
  text "PB15" at 35,910 h60
  text "3.3V" at 2020,905 h59.06
  text "BOOT0" at 20,605 h60
  text "Boot pins have pull-down. / Mount jumper to set '1'." at 920,565 h78.74
  text "PD11" at 2005.24,510 h59.06
  text "PB12" at 25,505 h60
  text "PD15" at 1998.23,405.7 h59.06
  text "PC7" at 2028.36,310.66 h59.06
  text "BT0" at 1145,30 h60 r90
  text "VCC" at 1250,30 h60 r90
  text "BT1" at 1345,30 h60 r90
  text "PB4/TRST" at 245,25 h60 r90
  text "PA15/TDI" at 345,25 h60 r90
  text "PB3/TDO" at 445,25 h60 r90
  text "PA13/TMS/SWDIO" at 545,25 h60 r90
  text "PA14/TCK/SWCLK" at 645,25 h60 r90
  text "nRST" at 845,25 h60 r90
  text "VCC" at 1445,25 h60 r90
Bottom Overlay:
  lines w10: 980,1530 980,1680 980,1690 985,1690 1150,1690 1150,1530 980,1530 ; 1175,1510 1240,1465 1215,1435 1175,1510
  text "C" at 1075,2305 h250
  text "W" at 820,2255 h250
  text "p" at 1355,2230 h250
  text "RoHS / PB-Free" at 1520,1705 h50 r270
  text "NewAE Technology Inc." at 1730,1255 h50 r270
  text "NAE-CW308T-STM32F-CSP-03" at 1625,1200 h50 r270
  text "nRST" at 660,905 h59.06 r90
  text "PA0" at 765,865 h59.06 r90
  text "0" at 985,825 h45
  text "1" at 1190,825 h45
  text "0" at 1405,820 h45
  text "1" at 1600,820 h45
  text "REG_OFF" at 1235,760 h59.06
  text "PDR_ON" at 1655,750 h59.06
Top Solder:
  lines w8: 976.83,1666.26 977,1692.1 ; 977.18,1527.64 977.18,1545.19 ; 977.4,1692.7 989.87,1692.7 ; 977.78,1527.24 988.86,1527.24 ; 1134.53,1527.29 1152.07,1527.29 ; 1140.75,1692.74 1151.83,1692.74 ; 1152.47,1527.89 1152.47,1547 ; 1152.43,1674.79 1152.43,1692.34
Mechanical 1:
  the board outline again, w5
Mechanical 13:
  lines w5: 1152.34,1692.34 1152.43,1692.34

## Dimensions
2150,0 to 0,0 on Drill Drawing
0,-5 to 2150,0 on Drill Drawing
0,2585 to 0,0 on Drill Drawing
0,0 to 0,2585 on Drill Drawing